# EAGLE board CS8412_SM5813_PCM56_A (EAGLE 9.6.2)
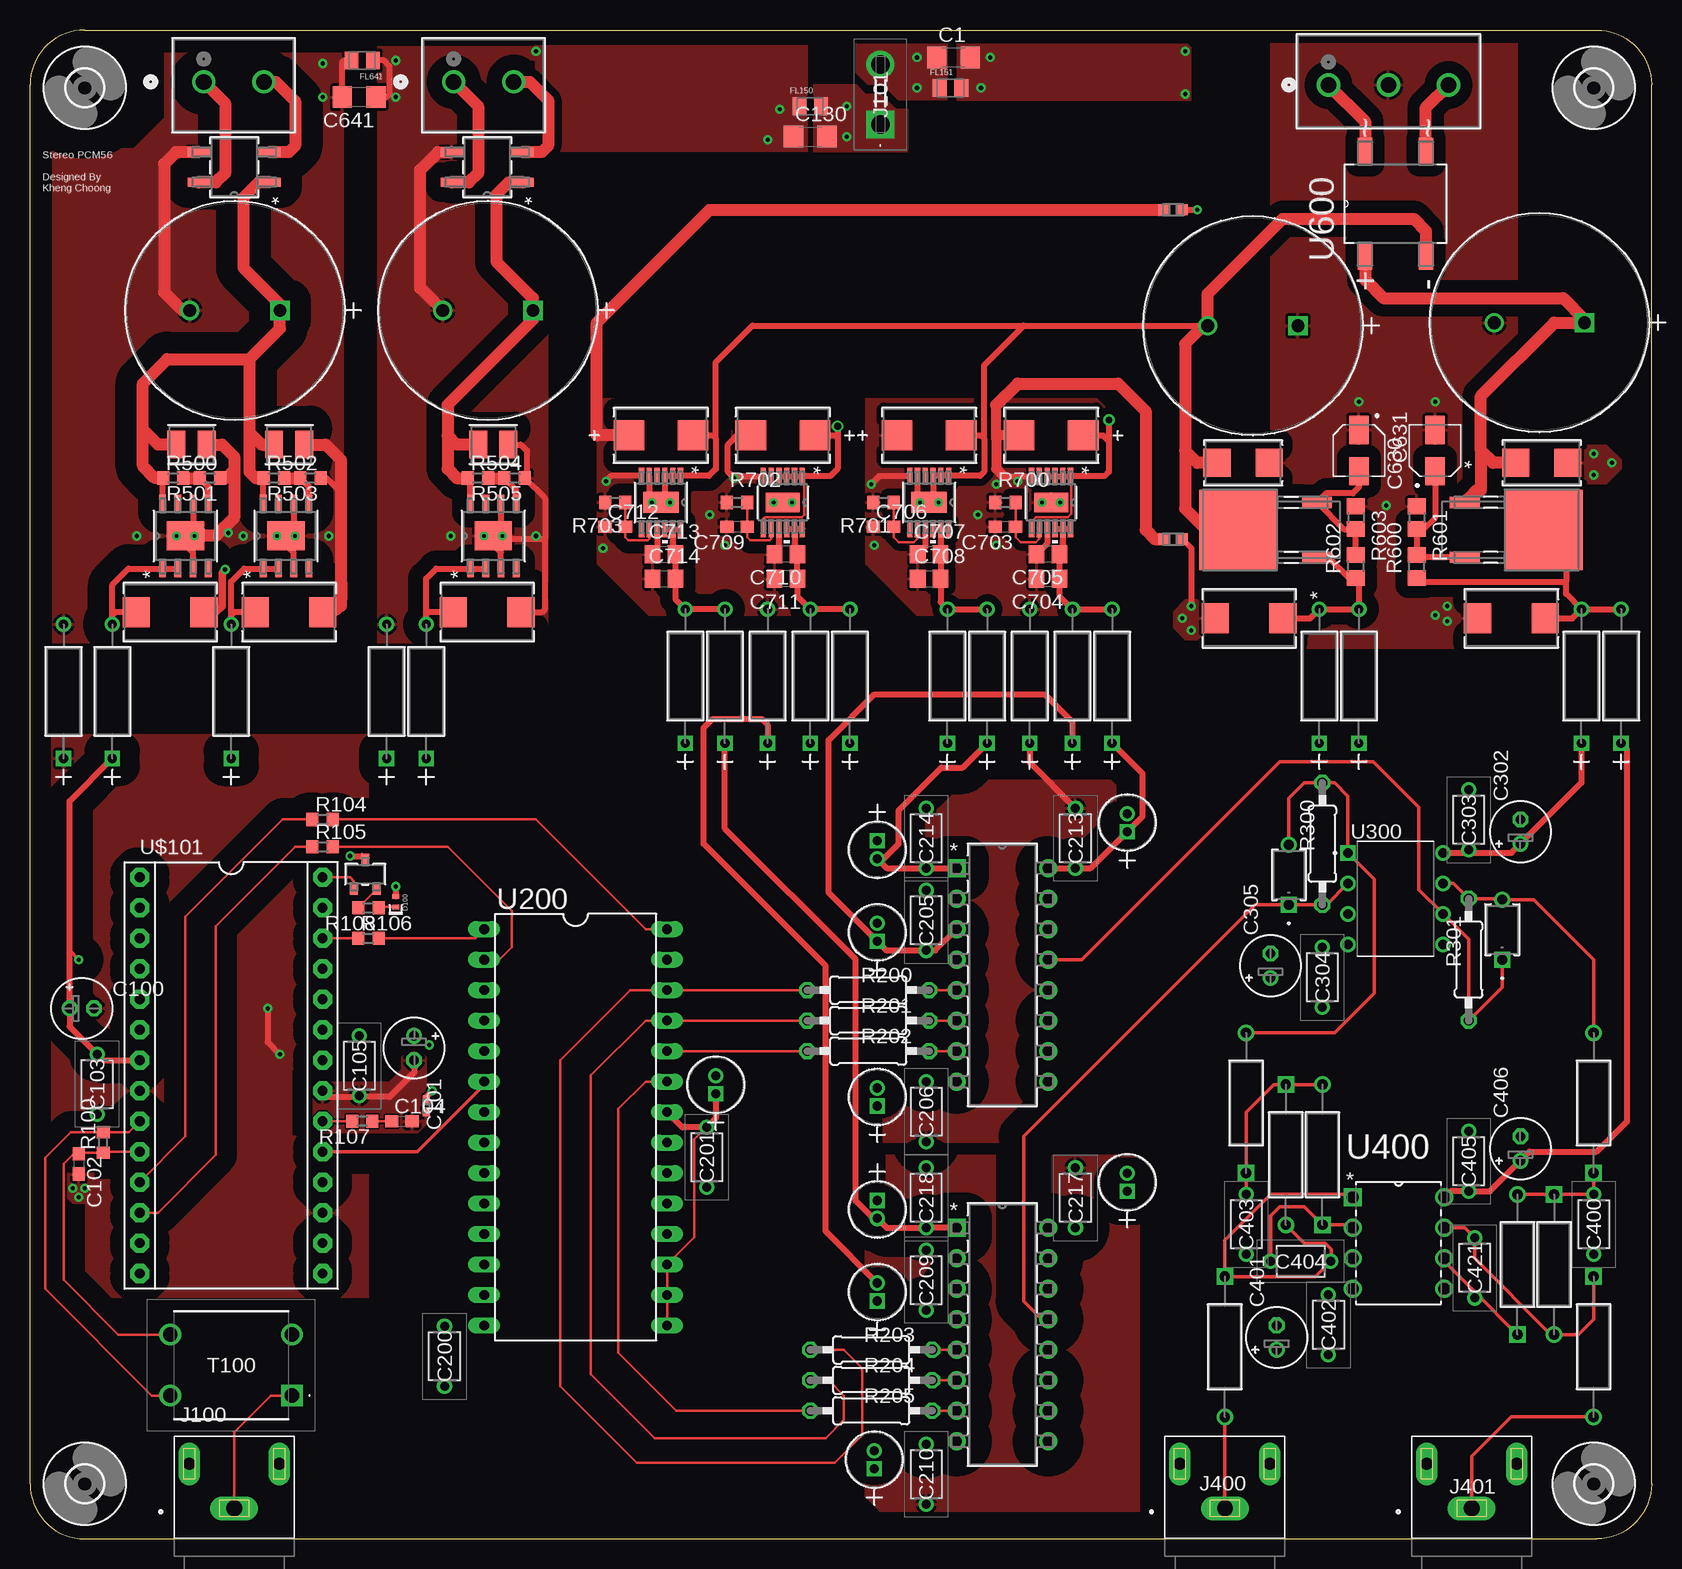
[diagram p0: board, top side]
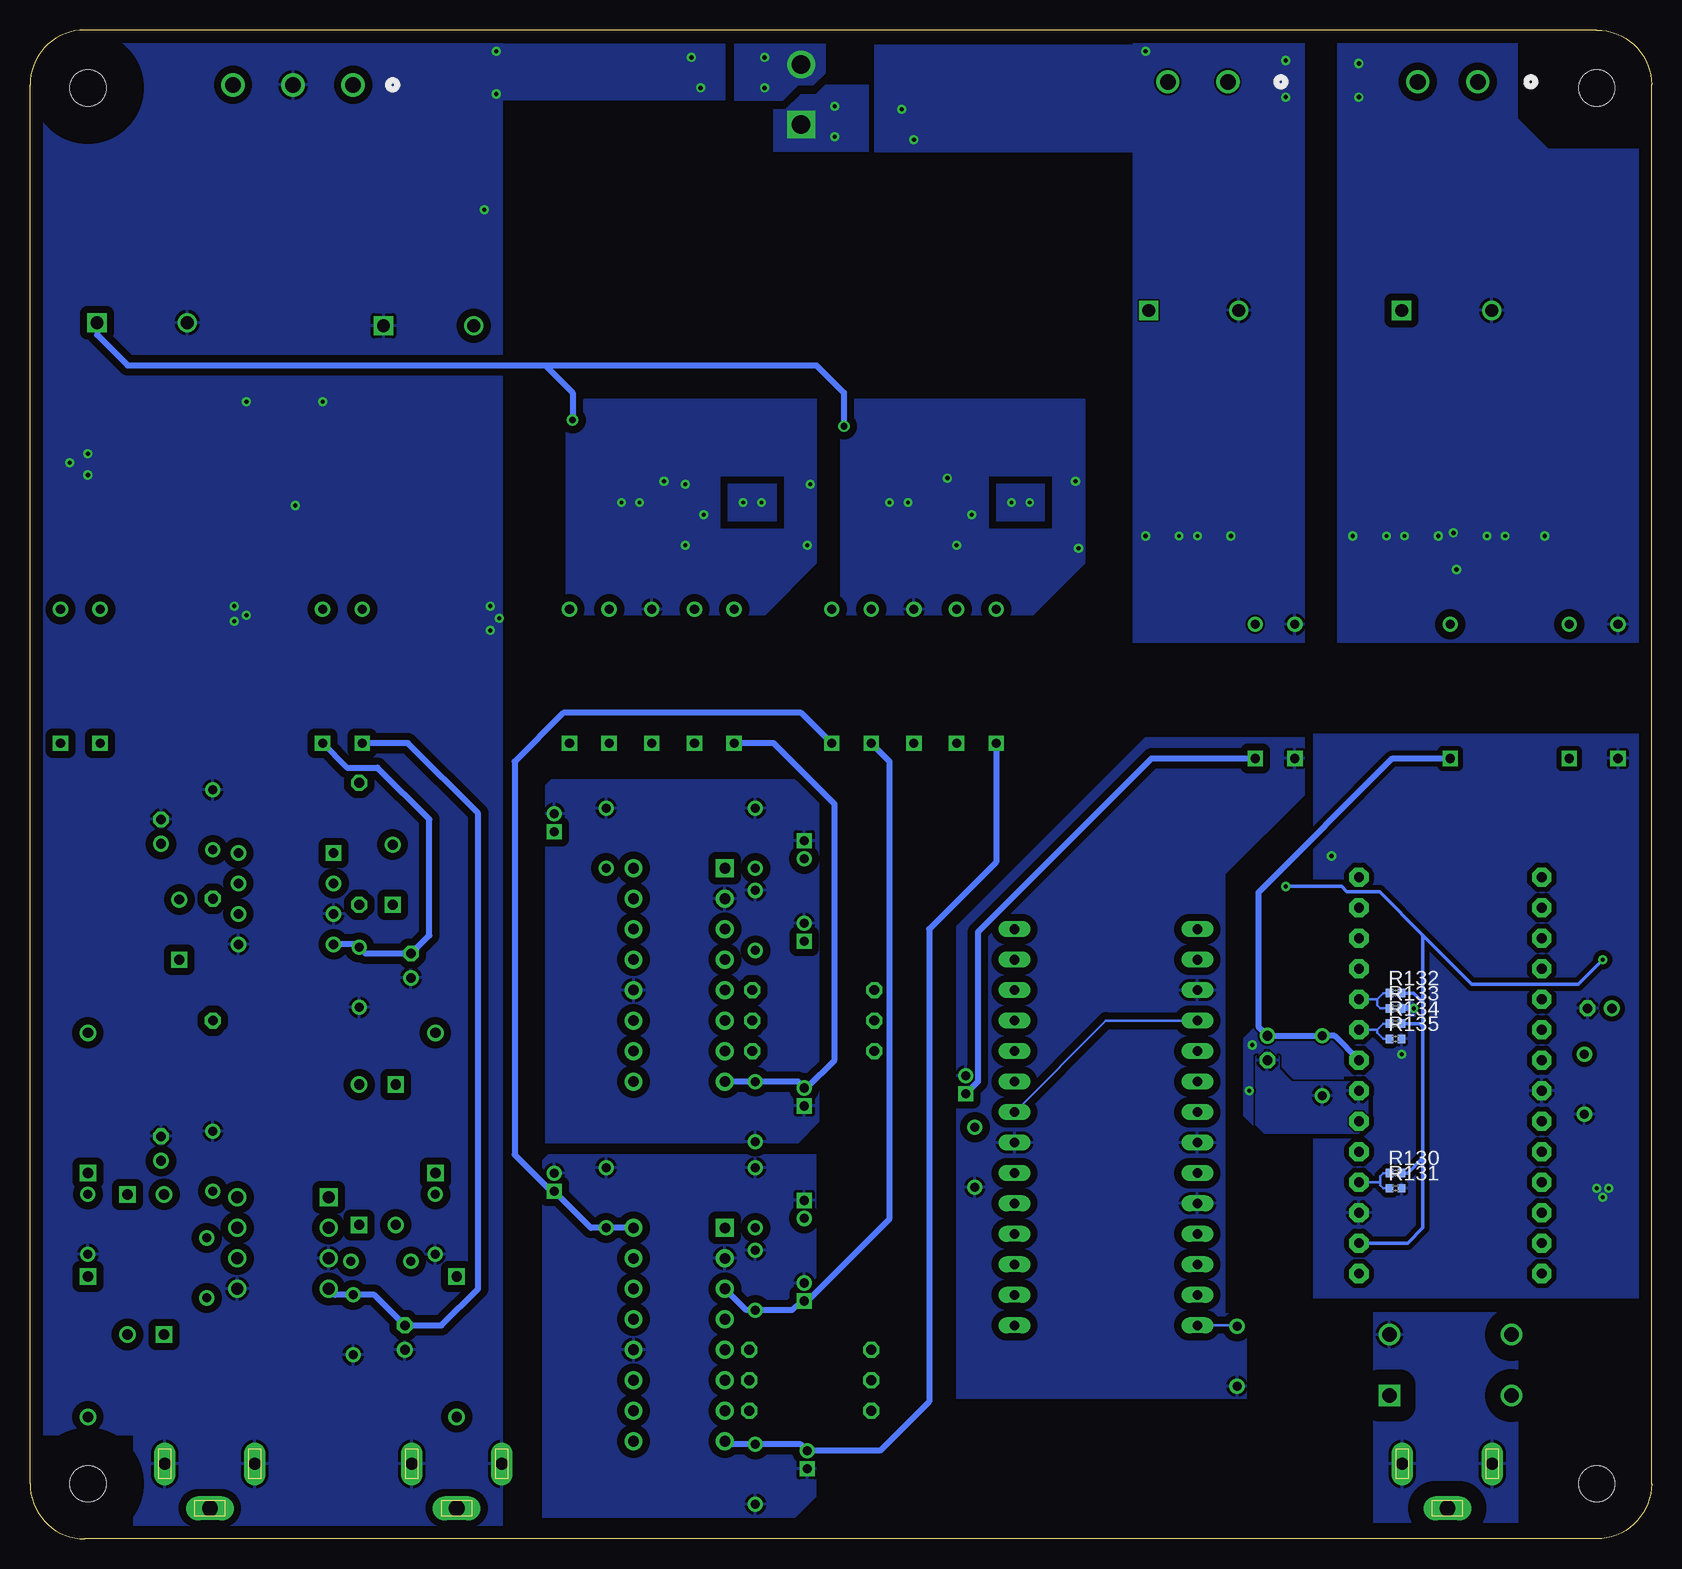
[diagram p1: board, bottom side, seen from below]

Size 135.13 x 125.73 mm. Coordinates in mm from the lower left corner, seen from the top.
Outline: 0,4.57 arc90 4.57,0 130.56,0 arc90 135.13,4.57 135.13,121.16 arc90 130.56,125.73 4.57,125.73 arc90 0,121.16 0,4.57
Copper layers (1*16): Top 0.035mm / dielectric 1.5mm / Bottom 0.035mm
Design rules "default *": minimum track width 6mil, minimum drill 0.35mm, track to track 6mil, track to pad 6mil, pad to pad 6mil, via to via 6mil, smd to smd 6mil, copper to edge 40mil, drill to drill 6mil, minimum pad ring 10mil, minimum via ring 8mil, stop-mask expansion 4mil, vias tented up to drill 13mil, thermal gap 10mil
Net classes: 1 Diff_Pair: width 0.406 mm

## Footprints (pad centres in the part's own frame; a part is rotated, then mirrored left to right if it is on the bottom)
C1206 = smd 1.6 x 1.8: 1 -1.4,0; 2 1.4,0
CAPMP7.6X4.3_3.1N_KEM = smd 2.56 x 2.5: 1 -2.672,0; 2 2.672,0
E2-5 = drill 0.813 pad 1.27: + -1.016,0 | drill 0.813 pad 1.27 octagon: - 1.016,0
C0603 = smd 1.1 x 1: 1 -0.85,0; 2 0.85,0
K104K15X7RF5TH5 = drill 0.75 pad 1.2: 1 0,0; 2 5,0
CAP_PAN_4X7_PAN = drill 0.762 pad 1.27 square: 1 0,0 | drill 0.762 pad 1.27: 2 1.499,0
CAP_K-SERIES_15-H5_VIS = drill 0.813 pad 1.321 square: 1 0,0 | drill 0.813 pad 1.321: 2 5.004,0
PCAP_18X355_PAN = drill 1.067 pad 1.524 square: 1 0,0 | drill 1.067 pad 1.524: 2 7.518,0
CAP_293D-B_VSS = smd 1.498 x 2.311: 1 -1.258,0; 2 1.258,0
CAP_7343-43_TR3 = smd 2.261 x 2.489: 1 -2.819,0; 2 2.819,0
CAP_293D-C_VSS = smd 2.261 x 2.311: 1 -2.172,0; 2 2.172,0
CAPAE430X550N = smd 2.36 x 1.62: 1 -1.725,0; 2 1.725,0
C0805 = smd 1.3 x 1.5: 1 -0.95,0; 2 0.95,0
0402(POL) = smd 0.399 x 0.6: 1 -0.435,0; 2 0.435,0
BEADC2012X105N = smd 1.14 x 1.47: 1 -0.89,0; 2 0.89,0
3,0 = hole 3: 0,0
SWITCHCRAFT_PJRAN1X1U01X = drill 1.3 pad 2 long: 1 0,0 | drill 1 pad 1.8 long: 2 -3.75,3.7; 3 3.75,3.7
23765952 = drill 1.55 pad 2.325 square: 1 0,0 | drill 1.55 pad 2.325: 2 5,0
CONN2_710002_WRE = drill 1.295 pad 1.803: 1 0,0; 2 5.004,0
CONN3_WR-TBL-1377_WRE = drill 1.295 pad 1.803: 1 0,0; 2 5.004,0; 3 10.008,0
IND_BLM15_0402_MUR = smd 0.711 x 0.559: 1 -0.521,0; 2 0.521,0
IND_BOURNS_78F = drill 0.762 pad 1.27 square: 1 0,0 | drill 0.762 pad 1.27: 2 11.176,0
IND_BLM18_0603_MUR = smd 0.965 x 0.94: 1 -0.749,0; 2 0.749,0
R0603 = smd 1 x 1.1: 1 -0.85,0; 2 0.85,0
R0402 = smd 0.6 x 0.7: 1 -0.5,0; 2 0.5,0
0207/10 = drill 0.813 octagon: 1 -5.08,0; 2 5.08,0
YAG_MF25_YAG = drill 0.864 pad 1.372 square: 1 0,0 | drill 0.864 pad 1.372: 2 11.684,0
R0805 = smd 1.3 x 1.5: 1 -0.95,0; 2 0.95,0
DA102C = drill 1.2 pad 1.8 square: 1 0,0 | drill 1.2 pad 1.8: 3 0,-5.08; 4 10.16,-5.08; 6 10.16,0
RD_8_2_ADI = smd 1.46 x 0.559: 1 -2.724,1.905; 2 -2.724,0.635; 3 -2.724,-0.635; 4 -2.724,-1.905; 5 2.724,-1.905; 6 2.724,-0.635; 7 2.724,0.635; 8 2.724,1.905 | smd 2.413 x 3.099: EPAD 0,0
SOT_BT3906_ONS = smd 0.66 x 0.914: 1 -0.95,-1.245; 2 0.95,-1.245; 3 0,1.245
DIL28 = drill 0.813 long: 1 -16.51,-7.62; 2 -13.97,-7.62; 3 -11.43,-7.62; 4 -8.89,-7.62; 5 -6.35,-7.62; 6 -3.81,-7.62; 7 -1.27,-7.62; 8 1.27,-7.62; 9 3.81,-7.62; 10 6.35,-7.62; 11 8.89,-7.62; 12 11.43,-7.62; 13 13.97,-7.62; 14 16.51,-7.62; 15 16.51,7.62; 16 13.97,7.62; 17 11.43,7.62; 18 8.89,7.62; 19 6.35,7.62; 20 3.81,7.62; 21 1.27,7.62; 22 -1.27,7.62; 23 -3.81,7.62; 24 -6.35,7.62; 25 -8.89,7.62; 26 -11.43,7.62; 27 -13.97,7.62; 28 -16.51,7.62
DIP-16E5.3 = drill 0.889 pad 1.499 square: 1 0,0 | drill 0.889 pad 1.499: 2 0,-2.54; 3 0,-5.08; 4 0,-7.62; 5 0,-10.16; 6 0,-12.7; 7 0,-15.24; 8 0,-17.78; 9 7.62,-17.78; 10 7.62,-15.24; 11 7.62,-12.7; 12 7.62,-10.16; 13 7.62,-7.62; 14 7.62,-5.08; 15 7.62,-2.54; 16 7.62,0
DIP794W45P254L959H508Q8 = drill 0.78 pad 1.13 square: 1 -3.97,3.81 | drill 0.78 pad 1.13: 2 -3.97,1.27; 3 -3.97,-1.27; 4 -3.97,-3.81; 5 3.97,-3.81; 6 3.97,-1.27; 7 3.97,1.27; 8 3.97,3.81
DIP254P762X533-8 = drill 0.991 square: 1 -7.62,7.62 | drill 0.991: 2 -7.62,5.08; 3 -7.62,2.54; 4 -7.62,0; 5 0,0; 6 0,2.54; 7 0,5.08; 8 0,7.62
TO-269AA_3P8X4P75_DIO = smd 1.803 x 0.762: 1 -2.959,1.25; 2 -2.959,-1.25; 3 2.959,-1.25; 4 2.959,1.25
SOT508P985X260-4N = smd 2.235 x 1.245: 1 -4.394,2.54; 2 -4.394,-2.54; 3 4.394,-2.54; 4 4.394,2.54
KVU3 = smd 0.94 x 2.489: 1 -2.286,-6.413; 3 2.286,-6.413 | smd 6.706 x 6.528: 2 0,0.152
MSE_12_ADI = smd 1.397 x 0.432: 1 -2.184,1.625; 2 -2.184,0.975; 3 -2.184,0.325; 4 -2.184,-0.325; 5 -2.184,-0.975; 6 -2.184,-1.625; 7 2.184,-1.625; 8 2.184,-0.975; 9 2.184,-0.325; 10 2.184,0.325; 11 2.184,0.975; 12 2.184,1.625 | smd 1.651 x 2.845: EPAD 0,0
05-08-1666_ADI = smd 1.333 x 0.432: 1 -2.216,1.625; 2 -2.216,0.975; 3 -2.216,0.325; 4 -2.216,-0.325; 5 -2.216,-0.975; 6 -2.216,-1.625; 7 2.216,-1.625; 8 2.216,-0.975; 9 2.216,-0.325; 10 2.216,0.325; 11 2.216,0.975; 12 2.216,1.625 | smd 1.753 x 2.946: 13 0,0
DIL28' = drill 0.813 pad 1.6 octagon: 1 -16.51,-7.62; 2 -13.97,-7.62; 3 -11.43,-7.62; 4 -8.89,-7.62; 5 -6.35,-7.62; 6 -3.81,-7.62; 7 -1.27,-7.62; 8 1.27,-7.62; 9 3.81,-7.62; 10 6.35,-7.62; 11 8.89,-7.62; 12 11.43,-7.62; 13 13.97,-7.62; 14 16.51,-7.62; 15 16.51,7.62; 16 13.97,7.62; 17 11.43,7.62; 18 8.89,7.62; 19 6.35,7.62; 20 3.81,7.62; 21 1.27,7.62; 22 -1.27,7.62; 23 -3.81,7.62; 24 -6.35,7.62; 25 -8.89,7.62; 26 -11.43,7.62; 27 -13.97,7.62; 28 -16.51,7.62

## Placement (x,y rotation side)
C1  [C1206]  76.96,123.44 0 top
C22  T491D226K035ATAUTO  [CAPMP7.6X4.3_3.1N_KEM]  85.09,91.95 180 top
C23  T491D226K035ATAUTO  [CAPMP7.6X4.3_3.1N_KEM]  74.93,91.95 0 top
C61  T491D226K035ATAUTO  [CAPMP7.6X4.3_3.1N_KEM]  62.74,91.95 180 top
C62  T491D226K035ATAUTO  [CAPMP7.6X4.3_3.1N_KEM]  52.58,91.95 0 top
C100  [E2-5]  4.32,44.2 0 top
C101  [E2-5]  32,40.89 270 top
C102  10nF  [C0603]  4.06,31.24 270 top
C103  K104K15X7RF5TH5  [K104K15X7RF5TH5]  5.59,40.39 270 top
C104  47nF  [C0603]  30.99,34.8 0 top
C105  K104K15X7RF5TH5  [K104K15X7RF5TH5]  27.43,41.91 270 top
C130  [C1206]  65.02,116.84 0 top
C200  K104K15X7RF5TH5  [K104K15X7RF5TH5]  34.54,12.7 90 top
C201  K104K15X7RF5TH5  [K104K15X7RF5TH5]  56.39,34.29 270 top
C202  EEAGA1C100H  [CAP_PAN_4X7_PAN]  57.15,37.08 90 top
C204  EEAGA1C100H  [CAP_PAN_4X7_PAN]  70.61,49.78 90 top
C205  K104K15X7RF5TH5  [K104K15X7RF5TH5]  74.68,49.02 90 top
C206  K104K15X7RF5TH5  [K104K15X7RF5TH5]  74.68,38.1 270 top
C207  EEAGA1C100H  [CAP_PAN_4X7_PAN]  70.61,36.07 90 top
C208  EEAGA1C100H  [CAP_PAN_4X7_PAN]  70.61,19.81 90 top
C209  K104K15X7RF5TH5  [K104K15X7RF5TH5]  74.68,19.05 90 top
C210  K104K15X7RF5TH5  [K104K15X7RF5TH5]  74.68,7.87 270 top
C211  EEAGA1C100H  [CAP_PAN_4X7_PAN]  70.36,5.84 90 top
C212  EEAGA1C100H  [CAP_PAN_4X7_PAN]  91.44,58.93 90 top
C213  K104K15X7RF5TH5  [K104K15X7RF5TH5]  87.12,55.88 90 top
C214  K104K15X7RF5TH5  [K104K15X7RF5TH5]  74.68,55.88 90 top
C215  EEAGA1C100H  [CAP_PAN_4X7_PAN]  70.61,58.17 270 top
C216  EEAGA1C100H  [CAP_PAN_4X7_PAN]  91.44,28.96 90 top
C217  K104K15X7RF5TH5  [K104K15X7RF5TH5]  87.12,25.91 90 top
C218  K104K15X7RF5TH5  [K104K15X7RF5TH5]  74.68,25.91 90 top
C219  EEAGA1C100H  [CAP_PAN_4X7_PAN]  70.61,28.19 270 top
C300  K220J15C0GF5TH5  [CAP_K-SERIES_15-H5_VIS]  104.9,52.83 90 top
C301  K220J15C0GF5TH5  [CAP_K-SERIES_15-H5_VIS]  122.68,48.26 90 top
C302  860020572003  [E2-5]  124.21,58.93 90 top
C303  K104K15X7RF5TH5  [K104K15X7RF5TH5]  119.89,57.4 90 top
C304  K104K15X7RF5TH5  [K104K15X7RF5TH5]  107.7,49.28 270 top
C305  860020572003  [E2-5]  103.38,47.75 90 top
C400  K104K15X7RF5TH5  [K104K15X7RF5TH5]  130.3,28.7 270 top
C401  860020572003  [E2-5]  103.89,16.76 90 top
C402  K104K15X7RF5TH5  [K104K15X7RF5TH5]  108.2,20.32 270 top
C403  K104K15X7RF5TH5  [K104K15X7RF5TH5]  101.35,28.7 270 top
C404  K104K15X7RF5TH5  [K104K15X7RF5TH5]  103.38,23.11 0 top
C405  K104K15X7RF5TH5  [K104K15X7RF5TH5]  119.89,28.96 90 top
C406  860020572003  [E2-5]  124.21,32.51 90 top
C421  K104K15X7RF5TH5  [K104K15X7RF5TH5]  120.4,20.07 90 top
C500  ECA-1VM472  [PCAP_18X355_PAN]  20.83,102.36 180 top
C501  293D225X0035B2TE3  [CAP_293D-B_VSS]  13.46,91.19 0 top
C502  TR3E226K035C0200  [CAP_7343-43_TR3]  11.68,77.22 0 top
C503  293D225X0035B2TE3  [CAP_293D-B_VSS]  21.59,91.19 0 top
C504  TR3E226K035C0200  [CAP_7343-43_TR3]  21.59,77.22 0 top
C505  ECA-1VM472  [PCAP_18X355_PAN]  41.91,102.36 180 top
C506  293D225X0035B2TE3  [CAP_293D-B_VSS]  38.61,91.19 0 top
C507  TR3E226K035C0200  [CAP_7343-43_TR3]  38.1,77.22 0 top
C600  ECA-1HM332  [PCAP_18X355_PAN]  129.54,101.35 180 top
C601  ECA-1HM332  [PCAP_18X355_PAN]  105.66,101.09 180 top
C602  293D225X0050C2TE3  [CAP_293D-C_VSS]  125.98,89.66 0 top
C603  293D225X0050C2TE3  [CAP_293D-C_VSS]  101.09,89.66 180 top
C604  TR3E226K035C0200  [CAP_7343-43_TR3]  123.44,76.71 180 top
C605  TR3E226K035C0200  [CAP_7343-43_TR3]  101.6,76.71 0 top
C630  UWT1C100MCL1GB  [CAPAE430X550N]  117.09,90.68 90 top
C631  UWT1C100MCL1GB  [CAPAE430X550N]  110.74,90.68 270 top
C641  [C1206]  27.43,120.14 180 top
C703  0.47uF  [C0603]  81.28,84.33 180 top
C704  GRM21BR6YA106ME43K  [C0805]  84.84,80.01 180 top
C705  GRM21BR6YA106ME43K  [C0805]  84.84,82.04 180 top
C706  4.7uF  [C0603]  71.12,84.33 0 top
C707  GRM21BR6YA106ME43K  [C0805]  74.93,82.04 0 top
C708  GRM21BR6YA106ME43K  [C0805]  74.93,80.01 0 top
C709  0.47uF  [C0603]  58.93,84.33 180 top
C710  GRM21BR6YA106ME43K  [C0805]  62.99,82.04 180 top
C711  GRM21BR6YA106ME43K  [C0805]  62.99,80.01 180 top
C712  4.7uF  [C0603]  48.77,84.33 0 top
C713  GRM21BR6YA106ME43K  [C0805]  52.83,82.04 0 top
C714  GRM21BR6YA106ME43K  [C0805]  52.83,80.01 0 top
D100  LTST-C281KRKT  [0402(POL)]  30.48,53.09 90 top
FL150  BLM21PG121SN1D  [BEADC2012X105N]  65.02,119.38 0 top
FL151  BLM21PG121SN1D  [BEADC2012X105N]  76.71,120.9 0 top
FL641  BLM21PG121SN1D  [BEADC2012X105N]  27.69,123.19 180 top
H100  MOUNT-HOLE3.0  [3,0]  130.3,4.57 0 top
H101  MOUNT-HOLE3.0  [3,0]  4.57,4.57 0 top
H102  MOUNT-HOLE3.0  [3,0]  130.3,120.9 0 top
H103  MOUNT-HOLE3.0  [3,0]  4.57,120.9 0 top
J100  PJRAN1X1U01X  [SWITCHCRAFT_PJRAN1X1U01X]  17.02,2.54 0 top
J101  2376595-2  [23765952]  70.87,117.86 90 top
J400  PJRAN1X1U01X  [SWITCHCRAFT_PJRAN1X1U01X]  99.57,2.54 0 top
J401  PJRAN1X1U01X  [SWITCHCRAFT_PJRAN1X1U01X]  120.14,2.54 0 top
J500  691137710002  [CONN2_710002_WRE]  14.48,121.41 0 top
J501  691137710002  [CONN2_710002_WRE]  35.31,121.41 0 top
J600  691137710003  [CONN3_WR-TBL-1377_WRE]  108.2,121.16 0 top
L100  BLM15AG700SN1D  [IND_BLM15_0402_MUR]  33.02,36.07 270 top
L500  78F1R0K-RC  [IND_BOURNS_78F]  6.86,65.02 90 top
L501  78F1R0K-RC  [IND_BOURNS_78F]  16.76,65.02 90 top
L502  78F1R0K-RC  [IND_BOURNS_78F]  33.02,65.02 90 top
L503  78F1R0K-RC  [IND_BOURNS_78F]  2.79,65.02 90 top
L504  78F1R0K-RC  [IND_BOURNS_78F]  29.72,65.02 90 top
L600  78F1R0K-RC  [IND_BOURNS_78F]  132.59,66.29 90 top
L601  78F1R0K-RC  [IND_BOURNS_78F]  129.29,66.29 90 top
L605  78F1R0K-RC  [IND_BOURNS_78F]  107.44,66.29 90 top
L606  78F1R0K-RC  [IND_BOURNS_78F]  110.74,66.29 90 top
L700  BLM18PG121SN1D  [IND_BLM18_0603_MUR]  95.25,83.31 0 top
L701  BLM18PG121SN1D  [IND_BLM18_0603_MUR]  95.25,110.74 0 top
L702  78F1R0K-RC  [IND_BOURNS_78F]  86.87,66.29 90 top
L703  78F1R0K-RC  [IND_BOURNS_78F]  90.17,66.29 90 top
L704  78F1R0K-RC  [IND_BOURNS_78F]  76.45,66.29 90 top
L705  78F1R0K-RC  [IND_BOURNS_78F]  79.76,66.29 90 top
L706  78F1R0K-RC  [IND_BOURNS_78F]  65.02,66.29 90 top
L707  78F1R0K-RC  [IND_BOURNS_78F]  68.33,66.29 90 top
L708  78F1R0K-RC  [IND_BOURNS_78F]  54.61,66.29 90 top
L709  78F1R0K-RC  [IND_BOURNS_78F]  57.91,66.29 90 top
L710  78F1R0K-RC  [IND_BOURNS_78F]  83.31,66.29 90 top
L711  78F1R0K-RC  [IND_BOURNS_78F]  61.47,66.29 90 top
R100  75R  [R0603]  6.1,33.02 90 top
R104  22R  [R0603]  24.38,59.94 0 top
R105  22R  [R0603]  24.38,57.66 0 top
R106  22R  [R0603]  28.19,50.04 0 top
R107  1K  [R0603]  27.69,34.8 180 top
R108  680R  [R0603]  28.19,52.58 180 top
R130  0R  [R0402]  21.34,30.48 0 bottom
R131  0R  [R0402]  21.34,29.21 0 bottom
R132  0R  [R0402]  21.34,45.47 0 bottom
R133  0R  [R0402]  21.34,44.2 0 bottom
R134  0R  [R0402]  21.34,42.93 0 bottom
R135  0R  [R0402]  21.34,41.66 0 bottom
R200  33R  [0207/10]  69.85,45.72 0 top
R201  33R  [0207/10]  69.85,43.18 0 top
R202  33R  [0207/10]  69.85,40.64 0 top
R203  33R  [0207/10]  70.1,15.75 0 top
R204  33R  [0207/10]  70.1,13.21 0 top
R205  33R  [0207/10]  70.1,10.67 0 top
R300  3k  [0207/10]  107.7,57.91 90 top
R301  3k  [0207/10]  119.89,48.26 90 top
R400  MFP-25BRD52-10K  [YAG_MF25_YAG]  130.3,30.48 90 top
R401  MFP-25BRD52-10K  [YAG_MF25_YAG]  123.95,17.02 90 top
R402  MFP-25BRD52-10K  [YAG_MF25_YAG]  127,28.7 270 top
R403  MFP-25BRD52-10K  [YAG_MF25_YAG]  101.35,30.48 90 top
R404  MFP-25BRD52-10K  [YAG_MF25_YAG]  107.7,26.16 90 top
R405  MFP-25BRD52-10K  [YAG_MF25_YAG]  104.65,37.85 270 top
R406  MFP-25BRD52-10K  [YAG_MF25_YAG]  99.57,21.84 270 top
R407  MFP-25BRD52-10K  [YAG_MF25_YAG]  130.3,21.84 270 top
R500  100k  [R0603]  11.94,88.39 0 top
R501  100k  [R0603]  14.99,88.39 180 top
R502  100k  [R0603]  20.32,88.39 0 top
R503  100k  [R0603]  23.37,88.39 180 top
R504  100k  [R0603]  37.34,88.39 0 top
R505  100k  [R0603]  40.39,88.39 180 top
R600  RC0805FR-07240RL  [R0805]  115.57,81.03 90 top
R601  RC0805FR-072K05L  [R0805]  115.57,85.09 270 top
R602  RC0805FR-07120RL  [R0805]  110.49,81.03 90 top
R603  RC0805FR-071K02L  [R0805]  110.49,85.09 270 top
R700  4.99k  [R0603]  81.28,86.36 0 top
R701  4.99k  [R0603]  71.12,86.36 180 top
R702  4.99k  [R0603]  58.93,86.36 0 top
R703  4.99k  [R0603]  48.77,86.36 180 top
T100  DA102C  [DA102C]  21.84,11.94 180 top
U8  ADP7104ARDZ-5.0-R7  [RD_8_2_ADI]  38.61,83.57 90 top
U102  MMBT3906  [SOT_BT3906_ONS]  27.94,55.37 0 top
U200  SM5813AP  [DIL28]  45.47,34.29 270 top
U201  PCM56P  [DIP-16E5.3]  77.22,55.88 0 top
U202  PCM56P  [DIP-16E5.3]  77.22,25.91 0 top
U300  OPA2134PA  [DIP794W45P254L959H508Q8]  113.79,53.34 0 top
U400  AD823ANZ  [DIP254P762X533-8]  117.86,20.83 0 top
U500  MB10S-13  [TO-269AA_3P8X4P75_DIO]  17.02,114.3 180 top
U501  MB10S-13  [TO-269AA_3P8X4P75_DIO]  38.1,114.3 180 top
U502  ADP7104ARDZ-5.0-R7  [RD_8_2_ADI]  12.95,83.57 90 top
U503  ADP7104ARDZ-5.0-R7  [RD_8_2_ADI]  21.34,83.57 90 top
U600  DF04S  [SOT508P985X260-4N]  113.79,111.25 90 top
U601  LM317MKVURG3  [KVU3]  125.98,84.07 270 top
U602  LM337KVURG3  [KVU3]  100.84,84.07 90 top
U700  LT3045EMSETRPBF  [MSE_12_ADI]  85.09,86.36 270 top
U701  LT3094EMSEPBF  [05-08-1666_ADI]  74.93,86.36 270 top
U702  LT3045EMSETRPBF  [MSE_12_ADI]  62.74,86.36 270 top
U703  LT3094EMSEPBF  [05-08-1666_ADI]  52.58,86.36 270 top
U$101  CS8412DIP  [DIL28']  16.76,38.61 270 top

## Library data of the parts
C1 C100-C102 C104 C130 C302 C305 C401 C406 C641 C703-C714 = rcl; SPICEPREFIX: C
C22 C23 C61 C62 = T491D226K035ATAUTO; COPYRIGHT: Copyright (C) 2024 Ultra Librarian. All rights reserved.; MANUFACTURER_PART_NUMBER: T491D226K035ATAUTO; MFR_NAME: Kemet
C103 C105 C200 C201 C205 C206 C209 C210 C213 C214 C217 C218 C303 C304 C400 C402-C405 C421 = K104K15X7RF5TH5; DESCRIPTION: Vishay K104K15X7RF5TH5 100nF Multilayer Ceramic Capacitor MLCC 50V dc +/-10% Tolerance Through Hole; HEIGHT: 6.6mm; MANUFACTURER_NAME: Vishay; MANUFACTURER_PART_NUMBER: K104K15X7RF5TH5; MOUSER_PART_NUMBER: 594-K104K15X7RF5TH5; MOUSER_PRICE-STOCK: https://www.mouser.co.uk/ProductDetail/Vishay-BC-Components/K104K15X7RF5TH5?qs=CuWZN%2F5Vbiofhf%252BuZNGw%2Fg%3D%3D
C202 C204 C207 C208 C211 C212 C215 C216 C219 = EEAGA1C100H; COPYRIGHT: Copyright (C) 2024 Ultra Librarian. All rights reserved.; MANUFACTURER_PART_NUMBER: EEAGA1C100H; MFR_NAME: Panasonic
C300 C301 = K220J15C0GF5TH5; COPYRIGHT: Copyright (C) 2024 Ultra Librarian. All rights reserved.; MANUFACTURER_PART_NUMBER: K220J15C0GF5TH5; MFR_NAME: Vishay; TYPE: Ceramic Capacitors
C500 C505 = ECA_1VM472; COPYRIGHT: Copyright (C) 2024 Ultra Librarian. All rights reserved.; MANUFACTURER_PART_NUMBER: ECA-1VM472; MFR_NAME: Panasonic
C501 C503 C506 = 293D225X0035B2TE3; COPYRIGHT: Copyright (C) 2024 Ultra Librarian. All rights reserved.; MANUFACTURER_PART_NUMBER: 293D225X0035B2TE3; MFR_NAME: Vishay
C502 C504 C507 C604 C605 = TR3E226K035C0200; COPYRIGHT: Copyright (C) 2024 Ultra Librarian. All rights reserved.; MANUFACTURER_PART_NUMBER: TR3E226K035C0200; MFR_NAME: Vishay
C600 C601 = ECA_1HM332; COPYRIGHT: Copyright (C) 2024 Ultra Librarian. All rights reserved.; MANUFACTURER_PART_NUMBER: ECA-1HM332; MFR_NAME: Panasonic
C602 C603 = 293D225X0050C2TE3; COPYRIGHT: Copyright (C) 2024 Ultra Librarian. All rights reserved.; MANUFACTURER_PART_NUMBER: 293D225X0050C2TE3; MFR_NAME: Vishay
C630 C631 = UWT1C100MCL1GB; MANUFACTURER: Nichicon; MAXIMUM_PACKAGE_HEIGHT: 5.50 mm; PARTREV: CAT.8100L; STANDARD: IPC 7351B
D100 = LTST-C281KRKT; AVAILABILITY: In Stock; CHECK_PRICES: https://www.snapeda.com/parts/LTST-C281KRKT/Lite-On/view-part/?ref=eda; DESCRIPTION: Red 631nm LED Indication - Discrete 2V 0402 (1005 Metric); MF: Lite-On; MP: LTST-C281KRKT; PACKAGE: 0402 Lite-On; PRICE: None; SNAPEDA_LINK: https://www.snapeda.com/parts/LTST-C281KRKT/Lite-On/view-part/?ref=snap
FL150 FL151 FL641 = BLM21PG121SN1D
H100-H103 = holes
J100 J400 J401 = PJRAN1X1U01X; MANUFACTURER: Switchcraft; MAXIMUM_PACKAGE_HIEGHT: 13mm; PARTREV: A; STANDARD: Manufacturer Recommendations
J101 = 2376595-2; ARROW_PART_NUMBER: 2376595-2; ARROW_PRICE-STOCK: https://www.arrow.com/en/products/2376595-2/te-connectivity?region=nac; DESCRIPTION: Contact Features: Contact Mating Area Plating Material Thickness 4 MICM | Terminal Orientation Straight | Contact Underplating Material Thickness 1.3 MICM | PCB Contact Termination Area Plating Material Thickness 4 MICM | Mating Tab Thickness .8 MM | Contact Underplating Material Nickel | Contact Mating Area Plating Material Thickness 157.48 MICIN | Mating Tab Width 6.35 MM | Terminal Size 6.35 | Mating Tab Thickness .032 INCH | Mating Tab Width .25 INCH | PCB Terminal Type Tab | Terminal Plating Material T; HEIGHT: 10.65mm; MANUFACTURER_NAME: TE Connectivity; MANUFACTURER_PART_NUMBER: 2376595-2; MOUSER_PART_NUMBER: 571-2376595-2; MOUSER_PRICE-STOCK: https://www.mouser.co.uk/ProductDetail/TE-Connectivity/2376595-2?qs=A6eO%252BMLsxmTtAfwrSC%2FSrg%3D%3D
J500 J501 = 691137710002; COPYRIGHT: Copyright (C) 2024 Ultra Librarian. All rights reserved.; MANUFACTURER_PART_NUMBER: 691137710002; MFR_NAME: Wurth Electronics
J600 = 691137710003; COPYRIGHT: Copyright (C) 2024 Ultra Librarian. All rights reserved.; MANUFACTURER_PART_NUMBER: 691137710003; MFR_NAME: Wurth Electronics; TYPE: Wire to Board
L100 = BLM15AG700SN1D; COPYRIGHT: Copyright (C) 2024 Ultra Librarian. All rights reserved.; MANUFACTURER_PART_NUMBER: BLM15AG700SN1D; MFR_NAME: Murata
L500-L504 L600 L601 L605 L606 L702-L711 = 78F1R0K_RC; COPYRIGHT: Copyright (C) 2024 Ultra Librarian. All rights reserved.; MANUFACTURER_PART_NUMBER: 78F1R0K-RC; MFR_NAME: Bourns Electronics
L700 L701 = BLM18PG121SN1D; COPYRIGHT: Copyright (C) 2024 Ultra Librarian. All rights reserved.; MANUFACTURER_PART_NUMBER: BLM18PG121SN1D; MFR_NAME: Murata
R100 R104-R108 R130-R135 R200-R205 R300 R301 R500-R505 R600-R603 R700-R703 = rcl; SPICEPREFIX: R
R400-R407 = MFP_25BRD52_10K; COPYRIGHT: Copyright (C) 2024 Ultra Librarian. All rights reserved.; MANUFACTURER_PART_NUMBER: MFP-25BRD52-10K; MFR_NAME: Yageo
T100 = DA102C; ARROW_PART_NUMBER: DA102C; ARROW_PRICE-STOCK: https://www.arrow.com/en/products/da102c/murata-power-solutions?region=nac; DESCRIPTION: Through Hole Audio Transformer; HEIGHT: 6.6mm; MANUFACTURER_NAME: Murata Electronics; MANUFACTURER_PART_NUMBER: DA102C; MOUSER_PART_NUMBER: 580-DA102C; MOUSER_PRICE-STOCK: https://www.mouser.co.uk/ProductDetail/Murata-Power-Solutions/DA102C?qs=h7KbnC2lZSYWJXuqlteIuw%3D%3D
U8 U502 U503 = ADP7104ARDZ_5_0_R7; COPYRIGHT: Copyright (C) 2024 Ultra Librarian. All rights reserved.; MANUFACTURER_PART_NUMBER: ADP7104ARDZ-5.0-R7; MFR_NAME: Analog Devices Inc
U102 = MMBT3906; COPYRIGHT: Copyright (C) 2024 Ultra Librarian. All rights reserved.; MANUFACTURER_PART_NUMBER: MMBT3906; MFR_NAME: onsemi
U200 = SM5813AP
U201 U202 = PCM56P; COPYRIGHT: Copyright (C) 2024 Ultra Librarian. All rights reserved.; MANUFACTURER_PART_NUMBER: PCM56P; MFR_NAME: Texas Instruments
U300 = OPA2134PA; AVAILABILITY: In Stock; CHECK_PRICES: https://www.snapeda.com/parts/OPA2134PA/Texas+Instruments/view-part/?ref=eda; DESCRIPTION: SoundPlus&trade; Audio Operational Amplifier with Low Distortion, Low Noise and Precision; MF: Texas; MP: OPA2134PA; PACKAGE: PDIP-8 Texas; PRICE: None; SNAPEDA_LINK: https://www.snapeda.com/parts/OPA2134PA/Texas+Instruments/view-part/?ref=snap
U400 = AD823ANZ; AVAILABILITY: In Stock; CHECK_PRICES: https://www.snapeda.com/parts/AD823ANZ/Analog+Devices/view-part/?ref=eda; DESCRIPTION: 16 MHz, Rail-to-Rail FET Input Dual Amplifier; MF: Analog Devices; MP: AD823ANZ; PACKAGE: PDIP-8 Analog Devices; PRICE: None; SNAPEDA_LINK: https://www.snapeda.com/parts/AD823ANZ/Analog+Devices/view-part/?ref=snap
U500 U501 = MB10S_13; COPYRIGHT: Copyright (C) 2024 Ultra Librarian. All rights reserved.; MANUFACTURER_PART_NUMBER: MB10S-13; MFR_NAME: Diodes Inc
U600 = DF04S; MPN: DF04S; OC_FARNELL: 1467469; OC_NEWARK: 18C6124; PACKAGE: SDIP-4; SUPPLIER: Fairchild
U601 = LM317MKVURG3; COPYRIGHT: Copyright (C) 2024 Ultra Librarian. All rights reserved.; MANUFACTURER_PART_NUMBER: LM317MKVURG3; MFR_NAME: Texas Instruments
U602 = LM337KVURG3; COPYRIGHT: Copyright (C) 2024 Ultra Librarian. All rights reserved.; MANUFACTURER_PART_NUMBER: LM337KVURG3; MFR_NAME: Texas Instruments
U700 U702 = LT3045EMSE; COPYRIGHT: Copyright (C) 2024 Ultra Librarian. All rights reserved.; MANUFACTURER_PART_NUMBER: LT3045EMSE#TRPBF; MFR_NAME: Analog Devices Inc
U701 U703 = LT3094EMSE; COPYRIGHT: Copyright (C) 2024 Ultra Librarian. All rights reserved.; MANUFACTURER_PART_NUMBER: LT3094EMSE#PBF; MFR_NAME: Analog Devices Inc
U$101 = cirrus-dar

## Nets
5V_RX: C502.1 L500.2 U502.1 U502.2
+12: C604.1 L600.2 L601.2 R600.1 U601.2
+16V: C22.1 C61.1 C600.1 C602.1 U600.1 U601.1 U700.1 U700.2 U700.3 U700.4 U700.7 U702.1 U702.2 U702.3 U702.4 U702.7
+IN1: C404.1 R404.1 U400.2
-12: C605.2 L605.2 L606.2 R602.1 U602.1
-16V: C23.2 C62.2 C601.2 C603.2 U600.2 U602.2 U701.1 U701.2 U701.3 U701.5 U701.13 U703.1 U703.2 U703.3 U703.5 U703.13
AGND: C1.2 C302.- C303.2 C304.2 C305.+ C400.2 C401.+ C402.2 C403.2 C405.2 C406.- C600.2 C601.1 C602.2 C603.1 C604.2 C605.1 C630.2 C631.1 FL151.2 J400.2 J400.3 J401.2 J401.3 J600.2 L700.2 L701.2 R601.1 R603.1 U300.3 U300.5 U400.3 U400.5
BCK: R105.2 U200.2
BCK_DF: R200.1 R203.1 U200.26
DATA_LEFT: R202.1 U200.24
DATA_RIGHT: R205.1 U200.23
DF: C507.1 L502.2 U8.1 U8.2
DGND_P: C500.2 C501.2 C502.2 C503.2 C504.2 C641.2 FL641.2 L503.2 R501.1 R503.1 U500.3 U502.3 U502.6 U502.EPAD U503.3 U503.6 U503.EPAD
DGND_S: C100.- C102.2 C103.2 L100.1 L503.1 R131.2 R133.2 R135.2 U102.3 U$101.8 U$101.17
FILTER: R107.2 U$101.20
GND_DF_P: C130.1 C505.2 C506.2 C507.2 C641.1 FL150.1 FL641.1 L504.2 R505.1 U8.3 U8.6 U8.EPAD U501.3
GND_DF_S: C200.1 C201.2 C202.2 L504.1 U200.3 U200.8 U200.10 U200.21
GND_VA+: C101.- C104.2 C105.2 L100.2 U$101.21
IDAC_L: C301.1 R301.1 U201.13 U300.6
IDAC_R: C300.1 R300.1 U202.13 U300.2
L_GND: C22.2 C23.1 C703.2 C704.2 C705.2 C706.1 C707.1 C708.1 L700.1 L710.2 R700.1 R701.2 U700.6 U700.9 U700.EPAD U701.6 U701.9
L_GND_S: C204.2 C205.2 C206.2 C207.1 C212.2 C213.2 C214.2 C215.1 L710.1 U201.2 U201.12
LEFT_FIL: C421.2 R402.2 R407.1 U400.7
M0: R134.1 R135.1 U$101.23
M1: R132.1 R133.1 U$101.24
M2: R130.1 R131.1 U$101.18
MCK: U200.6 U$101.19
N$1: C104.1 R107.1
N$2: R104.1 U$101.11
N$3: C630.1 R600.2 R601.2 U601.3
N$4: R105.1 U$101.12
N$5: J100.2 J100.3 T100.3
N$6: U102.1 U$101.28
N$7: C421.1 R401.1 U400.6
N$8: J100.1 T100.1
N$9: R108.2 U102.2
N$10: D100.1 R108.1
N$11: C200.2 U200.14
N$12: C703.1 R700.2 U700.8
N$13: R200.2 U201.5
N$14: C709.1 R702.2 U702.8
N$15: R201.2 U201.6
N$16: C707.2 C708.2 L704.2 L705.2 U701.10 U701.11 U701.12
N$17: C1.1 FL151.1 J101.2
N$18: R202.2 U201.7
N$19: C704.1 C705.1 L702.2 L703.2 U700.10 U700.11 U700.12
N$20: J600.1 U600.4
N$21: J500.2 U500.2
N$22: J500.1 U500.4
N$23: C400.1 R400.1 R401.2 R402.1
N$24: J400.1 R406.2
N$25: J401.1 R407.2
N$26: C403.1 R403.1 R404.2 R405.1
N$27: C706.2 R701.1 U701.8
N$28: C710.1 C711.1 L706.2 L707.2 U702.10 U702.11 U702.12
N$29: C712.2 R703.1 U703.8
N$30: R203.2 U202.5
N$31: R204.2 U202.6
N$32: R205.2 U202.7
N$33: C713.2 C714.2 L708.2 L709.2 U703.10 U703.11 U703.12
N$34: C130.2 FL150.2 J101.1
N$35: J600.3 U600.3
N$36: C500.1 C501.1 C503.1 R500.1 R502.1 U500.1 U502.8 U503.8
N$37: U502.7
N$38: R500.2 R501.2 U502.5
N$39: C631.2 R602.2 R603.2 U602.3
N$40: R502.2 R503.2 U503.5
N$41: J501.2 U501.2
N$42: J501.1 U501.4
N$43: C505.1 C506.1 R504.1 U8.8 U501.1
N$44: U503.7
N$45: U8.7
N$47: R504.2 R505.2 U8.5
R_GND: C61.2 C62.1 C709.2 C710.2 C711.2 C712.1 C713.1 C714.1 L701.1 L711.2 R702.1 R703.2 U702.6 U702.9 U702.EPAD U703.6 U703.9
R_GND_S: C208.2 C209.2 C210.2 C211.1 C216.2 C217.2 C218.2 C219.1 L711.1 U202.2 U202.12
RIGHT_FIL: C404.2 R405.2 R406.1 U400.1
RXN: C102.1 R100.1 T100.4 U$101.10
RXP: R100.2 T100.6 U$101.9
SDATA: R106.2 U200.1
SDATA_OUT: R106.1 U$101.26
V_LEFT: C301.2 R301.2 R400.2 U300.7
V_RIGHT: C300.2 R300.2 R403.2 U300.1
VA+5_L: C212.1 C213.1 L703.1 U201.16
VA+5_R: C216.1 C217.1 L707.1 U202.16
VA+_5V_RX: C101.+ C105.1 L501.1 U$101.22
VA+_RX: C504.1 L501.2 U503.1 U503.2
VA-5_L: C214.1 C215.2 L705.1 U201.1
VA-5_R: C218.1 C219.2 L709.1 U202.1
VDD+12_FIL: C405.1 C406.+ L600.1 U400.8
VDD+12_IV: C302.+ C303.1 L601.1 U300.8
VDD-12_FIL: C401.- C402.1 L605.1 U400.4
VDD-12_IV: C304.1 C305.- L606.1 U300.4
VDD_5V_RX: C100.+ C103.1 D100.2 L500.1 R130.2 R132.2 R134.2 U$101.7 U$101.16
VDD_DF: C201.1 C202.1 L502.1 U200.4 U200.15 U200.16 U200.17 U200.22
VL+5_L: C204.1 C205.1 L702.1 U201.3
VL+5_R: C208.1 C209.1 L706.1 U202.3
VL-5_L: C206.1 C207.2 L704.1 U201.8
VL-5_R: C210.1 C211.2 L708.1 U202.8
WS: R104.2 U200.28
WS_DF: R201.1 R204.1 U200.25

## Tracks (layer width: path | path; a pad name or v marks a point on that pad's centre or on a via)
5V_RX
  Top 0.508: L500.2 6.86,76.96 | 6.86,76.96 6.86,79.5 8.2,80.84 U502.1 U502.2 | 6.86,76.96 7.11,77.22 C502.1
+12
  Top 0.508: R600.1 115.89,79.76 128.02,79.76 | 128.02,79.76 128.02,78.74 L601.2 | L601.2 128.52,76.71 C604.1 | L601.2 L600.2 | U601.2 128.02,82.19 128.02,79.76
+16V  (via drill 0.55)
  Top 0.203: U700.7 83.47,84.8 83.79,85.13 86.47,85.13 86.77,85.43 86.77,88.49 U700.1 | U702.7 61.11,84.99 61.25,85.13 64.3,85.13 64.52,85.34 64.52,88.39 U702.1
  Top 0.508: C61.1 67.06,91.95 67.31,91.69 | 67.31,91.69 67.31,89.15 66.7,88.54 U702.1 U702.2 U702.3 U702.4 | U700.4 U700.3 U700.2 U700.1 89.56,88.54 89.92,88.9 89.92,91.44 | C22.1 89.41,91.95 89.92,91.44 | v89.92,93.22 89.92,91.44 | v67.31,92.71 67.31,91.69
  Top 1.016: U600.1 111.25,104.9 112.78,103.38 127.76,103.38 129.54,101.6 C600.1 127,101.35 120.9,95.25 120.9,90.68 | C602.1 121.92,89.66 120.9,90.68 | U601.1 120.23,87.02 120.23,87.07 120.57,87.41 120.9,87.41 120.9,90.68
  Bottom 0.508: C600.1 129.54,100.33 127,97.79 92.2,97.79 | 92.2,97.79 89.92,95.5 v89.92,93.22 | 92.2,97.79 69.6,97.79 67.31,95.5 v67.31,92.71
+IN1
  Top 0.305: C404.1 103.38,26.92 104.14,27.69 106.17,27.69 R404.1 109.98,26.16 U400.2
-12
  Top 0.508: U602.1 108.2,81.79 109.92,80.08 R602.1 110.74,79.82 L606.2 L605.2 106.68,76.71 C605.2
-16V  (via drill 0.3)
  Top 0.508: C62.2 56.9,91.95 57.15,91.69 | 57.15,91.69 57.15,89.15 56.57,88.58 U703.1 U703.2 U703.3 52.9,86.8 v53.34,86.36 U703.13 | C23.2 79.25,91.95 79.5,91.69 | 79.5,91.69 79.5,88.9 79.18,88.58 U701.1 U701.2 U701.3 75.25,86.8 v75.69,86.36 U701.13 | 79.5,91.69 79.5,97.79 82.8,101.09 | 82.8,101.09 97.79,101.09 | 57.15,91.69 57.15,98.04 60.2,101.09 82.8,101.09 | U703.5 51.6,86.57 v51.82,86.36 | U701.5 73.95,86.57 v74.17,86.36
  Top 1.016: U600.2 116.33,108.97 115.32,109.98 104.39,109.98 98.15,103.73 C601.2 97.79,101.09 96.27,99.57 96.27,90.68 | C603.2 97.28,89.66 96.27,90.68 | 96.27,90.68 96.27,85.85 97.79,84.33 100.43,84.33 U602.2
  pour Bottom (rank 2): 50.55,87.88 54.61,87.88 54.61,84.84 50.55,84.84
  pour Bottom (rank 2): 72.9,87.88 76.96,87.88 76.96,84.84 72.9,84.84
AGND  (via drill 0.35)
  Top 0.508: L700.2 96.77,82.54 v96.77,77.72 | L701.2 v97.28,110.74
  other vias: 96.01,76.71 96.77,75.69 130.3,90.42 131.83,89.66 130.3,88.65 80.01,123.44 79.25,120.9 96.27,123.95 96.27,120.4 110.74,94.74 117.09,94.74 113.03,86.11 118.11,77.72 118.11,76.45 117.09,76.96
  pour Bottom (isolate 0.61): 95.76,0 126.49,0 126.49,8.64 134.87,8.64 134.87,125.48 96.52,125.48 95.76,124.71
  pour Top (isolate 1.016): 103.38,74.17 103.38,125.73 123.95,125.73 123.95,74.17
  pour Top: 129.03,90.68 129.54,90.68 129.79,90.93 129.79,91.19 131.32,91.19 132.59,89.92 132.59,89.15 131.32,87.88 129.79,87.88 129.79,88.14 129.54,88.39 129.03,88.39
  pour Top: 97.79,77.98 97.54,77.98 97.28,78.23 96.27,78.23 95.25,77.22 95.25,75.95 96.27,74.93 97.28,74.93 97.54,75.18 97.79,75.18
  pour Top (no thermals): 77.22,124.71 77.22,119.89 96.77,119.89 96.77,124.21 96.27,124.71
  pour Bottom (no thermals): 77.22,124.71 77.22,119.89 96.77,119.89 96.77,124.21 96.27,124.71
BCK
  Top 0.203: R105.2 34.8,57.66 40.13,52.32 40.13,49.28 39.12,48.26 U200.2
BCK_DF
  Top 0.203: R200.1 U200.26 50.04,45.72 44.2,39.88 44.2,12.7 50.55,6.35 67.06,6.35 69.34,8.64 69.34,14.22 67.82,15.75 R203.1
DATA_LEFT
  Top 0.203: U200.24 R202.1
DATA_RIGHT
  Top 0.203: U200.23 51.31,38.1 49.02,35.81 49.02,15.49 53.85,10.67 R205.1
DF
  Top 0.508: L502.2 33.02,77.22 | 33.02,77.22 33.02,80.01 33.85,80.84 U8.1 U8.2 | C507.1 33.02,77.22
DGND_P  (via drill 0.3, 0.35)
  Top 0.508: U502.6 13.59,84.45 13.84,84.2 13.84,83.69 v13.72,83.57 | U502.3 13.59,82.17 v12.19,83.57 | C504.2 25.65,77.22 25.91,77.47 25.91,77.72 | U503.3 21.97,82.17 v20.57,83.57 | U503.6 21.97,83.69 v22.1,83.57 | R503.1 24.73,88.39 25.91,87.21 | 25.91,81.03 25.91,80.77 | C641.2 26.03,123.06 26.16,123.19 FL641.2
  Top 0.61: C502.2 15.49,77.22 16,77.72 16,80.52 v16.26,80.77
  Top 1.016: U500.3 12.17,115.55 11.18,114.55 11.18,103.89 12.7,102.36 C500.2 | C501.2 16,91.19 17.02,90.17 17.02,89.07 | 17.02,89.07 16.34,88.39 R501.1 | 17.02,89.07 17.02,85.09 15.49,83.57 14.48,83.57 13.84,84.2 | C503.2 24.64,91.19 25.91,89.92 25.91,87.21 25.91,81.03 | 25.91,80.77 25.91,79.72 25.92,79.71 25.92,78.27 25.91,78.26 25.91,77.72
  other vias: 8.89,83.57 16.51,83.82 17.78,83.57 24.89,83.57 24.38,120.14 24.38,122.94
  pour Bottom (isolate 0.61): 0,74.68 26.16,74.68 26.16,125.48 11.68,125.48 11.18,124.97 11.18,118.36 8.64,115.82 0,115.82
  pour Top (isolate 1.778): 0,74.68 26.16,74.68 26.16,125.48 11.68,125.48 11.18,124.97 11.18,118.36 8.64,115.82 0,115.82
DGND_S  (via drill 0.35)
  Top 0.508: v26.67,56.9 27.66,56.9 U102.3 | L100.1 33.02,36.83 v33.53,37.34 | v19.81,44.2 19.81,41.4 v20.83,40.39
  Bottom 0.508: v19.81,44.2 R133.2
  other vias: 3.56,29.21 4.57,29.21 4.06,28.45 33.27,41.15
  pour Bottom (isolate 0.406, rank 3): 0,67.06 28.19,67.06 28.19,20.07 0,20.07
  pour Top: 3.05,30.48 3.05,29.21 3.05,28.45 3.56,27.94 4.83,27.94 5.33,28.45 5.33,30.48
  pour Bottom (rank 4): 25.65,42.93 32.77,42.93 33.53,42.16 33.78,41.91 34.04,41.66 34.04,35.31 32,33.27 25.91,33.27 25.65,33.27
  pour Top (isolate 1.676, rank 3): 0,67.06 28.19,67.06 28.19,20.07 0,20.07
FILTER
  Top 0.203: U$101.20 R107.2
GND_DF_P  (via drill 0.3, 0.35)
  Top 0.508: U8.3 39.24,82.17 v37.85,83.57 38.1,83.31 42.93,83.31 | U8.6 39.24,83.69 v39.37,83.57 | C507.2 42.67,77.22 42.93,77.47 42.93,83.31 | C506.2 40.89,91.19 41.4,90.68 41.4,88.56 R505.1 42.93,86.7 42.93,83.31 | C641.1 29.72,120.14 29.97,120.4 29.97,122.68 29.46,123.19 FL641.1
  Top 1.016: C505.2 32.51,104.24 32.51,114.05 34.02,115.55 U501.3
  other vias: 42.16,83.57 35.05,83.57 30.48,120.14 30.48,123.19 62.48,119.13 61.47,116.59 42.16,123.95
  pour Bottom: 28.96,125.48 28.96,74.68 43.18,74.68 43.18,125.48
  pour Top (isolate 1.27): 28.96,125.48 28.96,74.68 43.18,74.68 43.18,125.48
  pour Top (isolate 0.61, no thermals): 42.16,124.46 64.77,124.46 64.77,115.57 42.16,115.57
  pour Bottom (isolate 0.61, no thermals): 42.16,124.46 64.77,124.46 64.77,115.57 42.16,115.57
GND_DF_S
  pour Bottom (isolate 0.61): 33.78,18.8 33.78,11.68 57.91,11.68 57.91,51.05 42.16,66.8 28.96,66.8 28.96,61.98 35.56,55.37 35.56,18.8
GND_VA+
  Top 0.508: U$101.21 24.89,36.83 27.35,36.83 | 27.35,36.83 C105.2 | C101.- 32,38.86 29.97,36.83 27.35,36.83
  pour Top: 24.38,38.1 29.97,38.1 30.23,38.35 30.99,39.12 30.99,40.13 31.5,40.64 31.75,40.64 32.51,40.64 33.02,40.13 33.02,34.54 32.77,34.29 32.26,33.78 29.21,33.78 24.38,33.78 23.88,34.29 23.62,34.54 23.62,37.59 24.13,38.1
  pour Bottom: 24.38,38.1 29.97,38.1 30.23,38.35 30.99,39.12 30.99,40.13 31.5,40.64 31.75,40.64 32.51,40.64 33.02,40.13 33.02,34.54 32.77,34.29 32.26,33.78 29.21,33.78 24.38,33.78 23.88,34.29 23.62,34.54 23.62,37.59 24.13,38.1
IDAC_L
  Top 0.305: U201.13 87.63,48.26 104.14,64.77 111.92,64.77 115.73,60.96 115.73,54.1 U300.6 119.89,49.94 R301.1 122.68,45.97 C301.1
IDAC_R
  Top 0.305: U202.13 84.33,18.29 82.8,19.81 82.8,33.53 102.11,52.83 C300.1 R300.1 108.04,52.83 U300.2
L_GND  (via drill 0.3, 0.35)
  Top 0.508: v70.1,87.88 70.8,88.58 U701.6 | U701.9 74.61,82.67 C707.1 | 80.77,91.95 80.52,91.69 | 81.13,88.54 U700.6 | U700.9 84.77,82.92 C705.2
  Top 0.813: C22.2 80.77,91.95 | 81.13,88.54 80.52,89.15 80.52,91.69 80.52,94.49
  Top 1.016: 80.52,94.49 82.3,96.27 90.68,96.27 92.96,93.98 92.96,84.07 93.73,83.31 L700.1
  other vias: 70.36,82.8 80.52,82.8 80.52,87.88 84.33,86.36 85.85,86.36 82.3,88.14 78.99,85.34
  pour Top (isolate 0.61, rank 3): 69.6,95 69.6,81.28 73.91,76.96 91.44,76.96 91.44,92.46 88.9,95
  pour Bottom (isolate 0.61, rank 3): 69.6,95 69.6,81.28 73.91,76.96 90.42,76.96 90.42,93.47 88.9,95
L_GND_S
  Top 0.508: L710.1 83.31,64.69 C213.2
  pour Top (isolate 1.93): 69.6,63.25 91.69,63.25 91.95,62.99 92.2,62.74 92.2,33.02 71.12,33.02 69.34,34.8 69.34,63.25
  pour Bottom (isolate 0.61): 69.6,63.25 91.69,63.25 91.95,62.99 92.2,62.74 92.2,33.02 71.12,33.02 69.34,34.8 69.34,63.25
LEFT_FIL
  Top 0.305: U400.7 119.55,25.91 C421.2 120.4,23.37 126.75,17.02 R402.2 129.03,17.02 130.3,18.29 R407.1
M0
  Bottom 0.203: R134.1 22.35,42.93 22.86,42.42 | 22.86,42.42 U$101.23 | 22.86,42.42 22.86,42.16 22.35,41.66 R135.1
M1
  Bottom 0.203: R132.1 22.35,45.47 22.86,44.96 | U$101.24 22.86,44.96 | 22.86,44.96 22.86,44.45 22.61,44.2 R133.1
M2
  Bottom 0.203: R130.1 22.35,30.48 22.61,30.23 22.61,29.72 | R131.1 22.35,29.21 22.61,29.46 22.61,29.72 | 22.61,29.72 U$101.18
MCK
  Top 0.305: U$101.19 32.26,32.26 37.85,37.85 U200.6
N$1
  Top 0.203: R107.1 C104.1
N$2
  Top 0.203: U$101.11 12.95,33.53 12.95,51.82 21.08,59.94 R104.1
N$3
  Top 0.508: R601.2 115.57,84.07 | 115.57,84.07 115.57,82.3 | 115.57,82.3 R600.2 | C630.1 117.09,85.09 116.08,84.07 115.57,84.07 | U601.3 116.08,81.79 115.57,82.3
N$4
  Top 0.203: U$101.12 10.67,27.18 15.49,32 15.49,51.05 22.1,57.66 R105.1
N$5
  pour Bottom (isolate 1.27): 23.11,18.8 23.11,18.8 23.11,0 11.18,0 11.18,18.8
N$6
  Top 0.203: U$101.28 26.67,55.12 26.99,54.8 U102.1
N$7
  Top 0.305: U400.6 117.86,23.11 120.4,20.57 | R401.1 120.4,20.57 | C421.1 120.4,20.57
N$8
  Top 0.203: J100.1 17.02,8.89 20.07,11.94 T100.1
N$9
  Top 0.203: R108.2 U102.2
N$10
  Top 0.203: R108.1 29.12,52.65 D100.1
N$11
  Bottom 0.203: C200.2 34.62,17.78 U200.14
N$12
  Top 0.203: R700.2 C703.1 82.13,83.48 82.55,83.06 83.82,83.06 84.11,83.35 U700.8
N$13
  Top 0.203: R200.2 U201.5
N$14
  Top 0.203: R702.2 C709.1 59.78,83.48 60.03,83.22 61.63,83.22 61.76,83.35 U702.8
N$15
  Top 0.203: R201.2 U201.6
N$16
  Top 0.508: U701.10 U701.11 | U701.11 U701.12 | U701.11 75.91,82.07 C707.2 C708.2 75.88,78.04 L704.2 L705.2
N$17  (via drill 0.35)
  other vias: 73.91,123.44 73.91,120.9
  pour Top (isolate 0.61, no thermals): 68.83,124.97 76.45,124.97 76.45,119.89 72.39,119.89 71.12,121.16 69.85,121.16 68.83,122.17
  pour Bottom (isolate 0.61, no thermals): 68.83,124.97 76.45,124.97 76.45,119.89 72.39,119.89 71.12,121.16 69.85,121.16 68.83,122.17
N$18
  Top 0.203: R202.2 U201.7
N$19
  Top 0.508: U700.10 U700.11 | U700.11 U700.12 | U700.11 86.06,82.32 C705.1 C704.1 85.79,78.55 L702.2 L703.2
N$20
  Top 1.016: J600.1 111.25,118.11 U600.4
N$21
  Top 1.016: J500.2 20.5,121.41 22.1,119.81 22.1,116.08 21.57,115.55 U500.2
N$22
  Top 1.016: J500.1 16.26,119.63 16.26,113.79 15.49,113.03 14.08,113.03 U500.4
N$23
  Top 0.305: R400.1 C400.1 R402.1 R401.2
N$24
  Top 0.305: R406.2 J400.1
N$25
  Top 0.305: J401.1 120.14,6.86 123.44,10.16 R407.2
N$26
  Top 0.305: R404.2 R405.1 103.63,37.85 101.35,35.56 R403.1 C403.1
N$27
  Top 0.203: R701.1 C706.2 71.97,83.48 72.39,83.06 73.66,83.06 73.95,83.35 U701.8
N$28
  Top 0.508: U702.10 U702.11 | U702.11 U702.12 | U702.11 63.71,82.59 63.94,82.36 C710.1 C711.1 63.94,78.55 L706.2 L707.2
N$29
  Top 0.203: R703.1 C712.2 49.62,83.48 49.87,83.22 51.47,83.22 51.6,83.35 U703.8
N$30
  Top 0.203: R203.2 U202.5
N$31
  Top 0.203: R204.2 U202.6
N$32
  Top 0.203: R205.2 U202.7
N$33
  Top 0.508: U703.11 53.55,82.27 C713.2 C714.2 53.78,78.3 L708.2 L709.2 | U703.11 U703.12 | U703.10 U703.11
N$34  (via drill 0.35)
  other vias: 68.07,119.38 68.07,116.84
  pour Top (isolate 0.61, no thermals): 73.15,115.57 73.15,119.13 72.14,119.13 70.87,120.4 69.6,120.4 68.83,121.16 65.28,121.16 65.28,115.57
  pour Bottom (isolate 0.61, no thermals): 73.15,115.57 73.15,119.13 72.14,119.13 70.87,120.4 69.6,120.4 68.83,121.16 65.28,121.16 65.28,115.57
N$35
  Top 1.016: U600.3 116.33,119.28 J600.3
N$36
  Top 0.508: U502.8 11.05,88.35 R500.1 | U503.8 19.43,88.35 R502.1
  Top 1.016: U500.1 19.07,113.05 17.78,111.76 17.78,105.92 20.83,102.87 C500.1 20.83,100.84 18.29,98.3 | R500.1 10.41,88.39 9.4,89.41 9.4,92.46 | 9.4,92.46 9.4,96.27 11.43,98.3 18.29,98.3 | 18.29,98.3 18.29,92.2 | C503.1 19.3,91.19 18.29,92.2 | C501.1 10.67,91.19 9.4,92.46 | R502.1 18.8,88.39 18.29,88.9 18.29,92.2
N$38
  Top 0.508: U502.5 14.86,87.67 R501.2
  Top 1.016: R500.2 R501.2
N$39
  Top 0.508: C631.2 110.74,87.63 110.24,87.12 108.01,87.12 U602.3 109.47,84.14 R603.2 R602.2
N$40
  Top 0.508: U503.5 23.24,87.67 R503.2
  Top 1.016: R502.2 R503.2
N$41
  Top 1.016: J501.2 41.66,121.41 43.18,119.89 43.18,116.08 42.65,115.55 U501.2
N$42
  Top 1.016: J501.1 37.34,119.38 37.34,113.79 36.58,113.03 35.16,113.03 U501.4
N$43
  Top 0.508: U8.8 36.7,88.18 R504.1
  Top 1.016: U501.1 41.04,113.03 39.88,113.03 38.86,112.01 38.86,106.43 41.91,103.38 C505.1 41.91,101.6 34.8,94.49 34.8,91.95 | C506.1 35.56,91.19 34.8,91.95 | 34.8,91.95 34.8,89.15 35.56,88.39 R504.1
N$47
  Top 0.508: U8.5 40.51,87.42 R505.2
  Top 1.016: R504.2 R505.2
R_GND  (via drill 0.3, 0.35)
  Top 0.508: U703.9 52.25,82.41 C713.1 | U703.6 48.44,88.58 v48.01,88.14 | U702.9 62.41,82.41 C710.2 | U702.6 58.83,88.54 v58.67,88.39 58.17,88.9 58.17,91.19 58.93,91.95 C61.2
  Top 1.016: C62.1 47.24,91.95 47.24,101.35 56.64,110.74 L701.1
  other vias: 47.75,82.55 57.91,82.8 61.98,86.36 63.5,86.36 56.64,85.34
  pour Top (isolate 1.016): 47.24,95 47.24,81.28 51.56,76.96 67.82,76.96 67.82,93.73 66.55,95
  pour Bottom (isolate 0.61, rank 3): 47.24,95 47.24,81.28 51.56,76.96 67.56,76.96 67.56,93.98 66.55,95
R_GND_S
  Top 0.508: C208.2 66.29,25.63 66.29,47.75 56.13,57.91 56.13,67.56 56.9,68.33 60.96,68.33 61.47,67.82 L711.1
  pour Bottom (isolate 0.61): 69.85,32 91.95,32 92.2,31.75 92.46,31.5 92.46,1.78 71.37,1.78 69.6,3.56 69.6,32
  pour Top (isolate 2.184): 69.85,32 91.95,32 92.2,31.75 92.46,31.5 92.46,1.78 71.37,1.78 69.6,3.56 69.6,32
RIGHT_FIL
  Top 0.305: R405.2 106.17,24.64 107.95,24.64 108.46,24.13 108.46,23.19 C404.2 107.11,21.84 R406.1 99.57,24.89 103.38,28.7 109.98,28.7 U400.1
RXN
  Top 0.203: U$101.10 6.18,32.26 R100.1 4.14,32.17 C102.1 3.64,32.09 2.79,31.24 2.79,21.59 7.37,17.02 T100.4
RXP
  Top 0.203: U$101.9 8.22,33.87 R100.2 3.39,33.87 1.27,31.75 1.27,20.83 10.16,11.94 T100.6
SDATA
  Top 0.203: R106.2 37.08,50.04 U200.1
SDATA_OUT
  Top 0.203: U$101.26 R106.1
V_LEFT
  Top 0.305: U300.7 118.62,54.61 R301.2 122.61,53.34 C301.2 125.3,53.26 130.3,48.26 R400.2
V_RIGHT
  Top 0.305: C300.2 104.9,61.72 106.17,62.99 R300.2 108.71,62.99 109.82,61.88 U300.1 112.01,54.96 112.01,45.47 108.71,42.16 R403.2
VA+5_L
  Top 0.508: U201.16 C213.1 88.39,55.88 C212.1 92.71,60.2 92.71,63.75 L703.1
VA+5_R
  Bottom 0.508: L707.1 70.87,68.83 90.68,68.83 94.74,64.77 94.74,32 91.69,28.96 C216.1 88.39,25.91 C217.1 U202.16
VA+_5V_RX
  Bottom 0.508: L501.1 21.59,65.02 32.77,53.85 32.77,42.67 C101.+ C105.1 26.42,41.91 U$101.22
VA+_RX
  Top 0.508: L501.2 16.76,76.96 | 16.76,76.96 16.76,79.76 17.85,80.84 U503.1 U503.2 | C504.1 17.02,77.22 16.76,76.96
VA-5_L
  Top 0.508: U201.1 C214.1 71.4,55.88 C215.2 71.14,56.67 72.39,57.91 72.39,60.71 75.95,64.26 77.72,64.26 L705.1
VA-5_R
  Top 0.508: U202.1 C218.1 71.4,25.91 C219.2 70.27,26.7 68.81,28.15 68.81,48.28 57.91,59.18 L709.1
VDD+12_FIL
  Top 0.508: L600.1 133.1,65.79 133.1,34.8 130.56,32.26 124.97,32.26 C406.+ 121.67,28.96 C405.1 118.36,28.96 U400.8
VDD+12_IV
  Top 0.508: L601.1 129.29,62.99 C302.+ 123.44,57.15 120.14,57.15 | U300.8 120.14,57.15 | C303.1 120.14,57.15
VDD-12_FIL
  Bottom 0.508: L605.1 103.63,66.29 97.79,60.45 97.79,20.83 100.84,17.78 C401.- 106.43,20.32 C402.1 109.73,20.32 U400.4
VDD-12_IV
  Bottom 0.508: L606.1 108.71,64.26 106.17,64.26 101.85,59.94 101.85,50.29 C305.- 107.19,48.77 C304.1 107.95,49.53 U300.4
VDD_5V_RX  (via drill 0.35)
  Top 0.305: v4.06,48.26 3.3,49.02 3.3,49.28
  Top 0.508: U$101.7 6.1,39.88 C103.1 3.3,42.67 C100.+ 3.3,49.28 3.3,61.47 L500.1 | v30.48,54.36 D100.2
  Bottom 0.305: 19.05,42.67 19.05,44.7 | 19.05,44.7 19.81,45.47 R132.2 | 19.05,42.67 19.05,31.75 | 19.05,31.75 20.32,30.48 R130.2 | 19.05,44.7 19.05,50.29 | v30.48,54.36 25.84,54.36 25.39,53.91 22.67,53.91 19.05,50.29 | 19.05,31.75 19.05,25.91 20.32,24.64 U$101.16 | 19.05,42.67 19.3,42.93 R134.2 | 19.05,50.29 14.99,46.23 6.1,46.23 v4.06,48.26
VDD_DF
  Top 0.203: U200.15 U200.16 U200.17 55.37,25.15 55.37,33.27 C201.1
  Top 0.508: U200.22 54.36,34.29 C201.1 57.15,35.05 C202.1
  Bottom 0.203: U200.22 45.47,43.18 U200.4
  Bottom 0.508: L502.1 41.66,65.02 56.13,50.55 56.13,38.1 C202.1
VL+5_L
  Top 0.508: U201.3 75.44,49.02 C205.1 71.37,49.02 C204.1 66.55,53.85 66.55,66.55 70.36,70.36 84.58,70.36 86.87,68.07 L702.1
VL+5_R
  Bottom 0.508: L706.1 63.5,64.77 63.5,26.67 70.36,19.81 C208.1 70.87,19.81 71.63,19.05 C209.1 75.44,19.05 U202.3
VL-5_L
  Bottom 0.508: L704.1 73.15,66.29 68.07,61.21 68.07,39.88 70.38,37.57 C207.2 71.14,38.1 C206.1 U201.8
VL-5_R
  Bottom 0.508: L708.1 54.61,56.39 60.2,50.8 60.2,11.43 64.29,7.34 C211.2 70.89,7.87 C210.1 76.96,7.87 U202.8
WS
  Top 0.203: R104.2 42.16,59.94 51.31,50.8 U200.28
WS_DF
  Top 0.203: R201.1 U200.25 51.31,43.18 46.74,38.61 46.74,13.72 52.07,8.38 66.29,8.38 67.82,9.91 67.82,11.94 66.55,13.21 R204.1

## Text on the board
tPlace: Stereo PCM56 / / Designed By / Kheng Choong